# Altium PCB Layout.PcbDoc
Units mm, origin at the board's own origin, x right, y up, seen from the top; angles counter-clockwise.
Board outline 152.4 x 101.6 mm, 2 copper layers (Top Layer, Bottom Layer); 11 components, 7 nets, 37 pads, 8 vias.
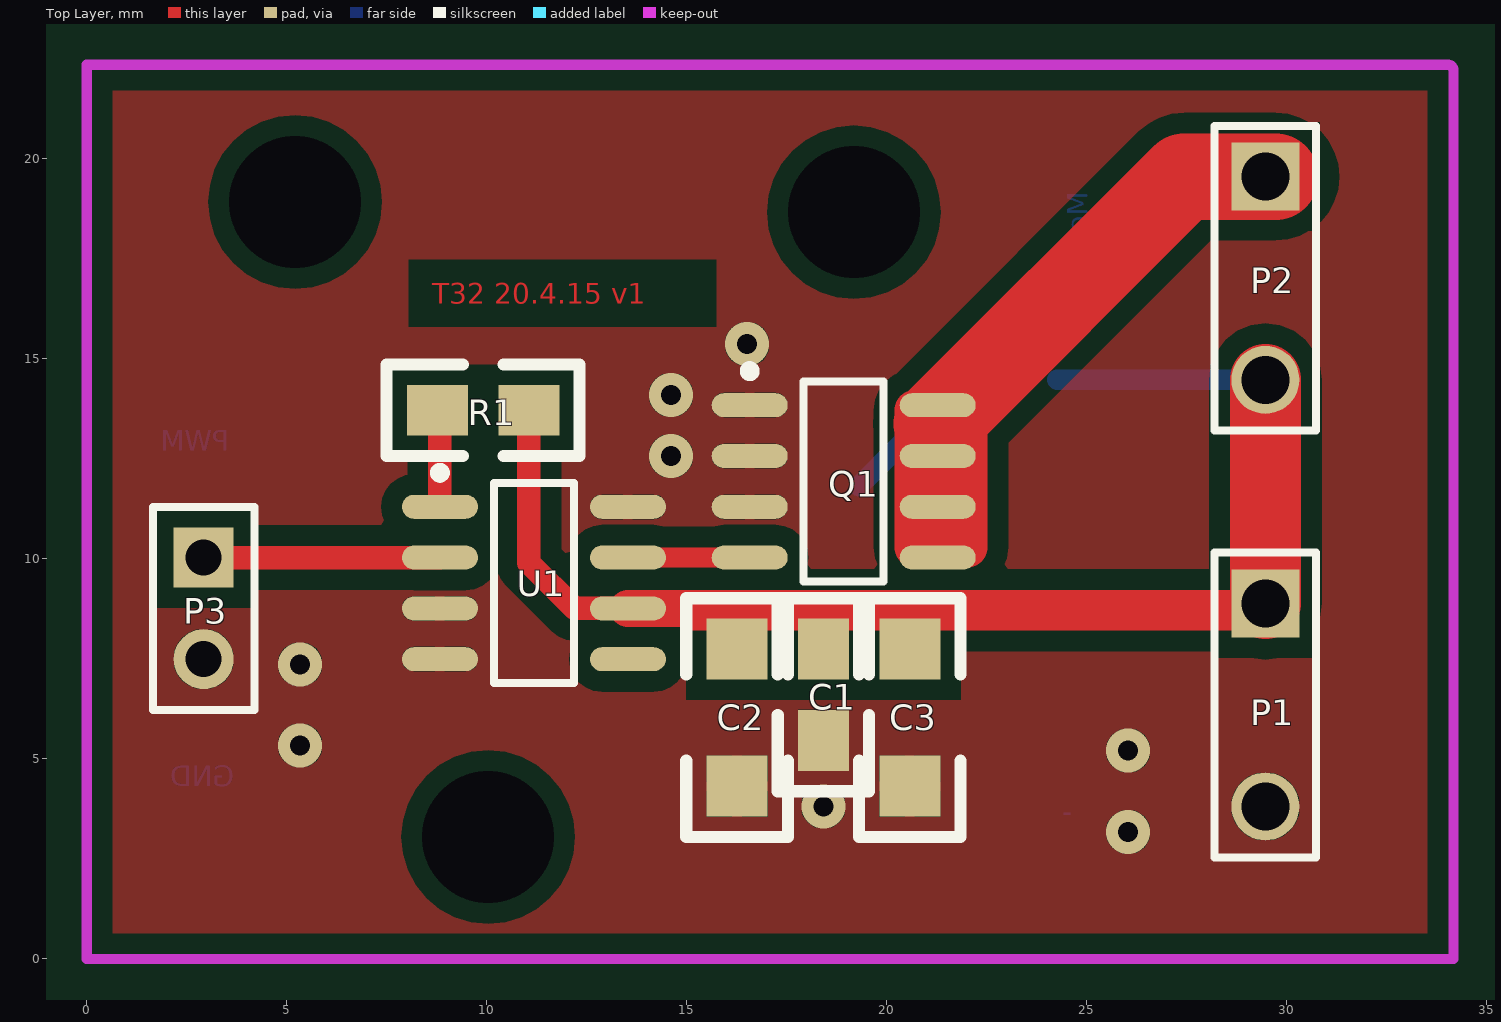
[diagram p0: Top Layer view]
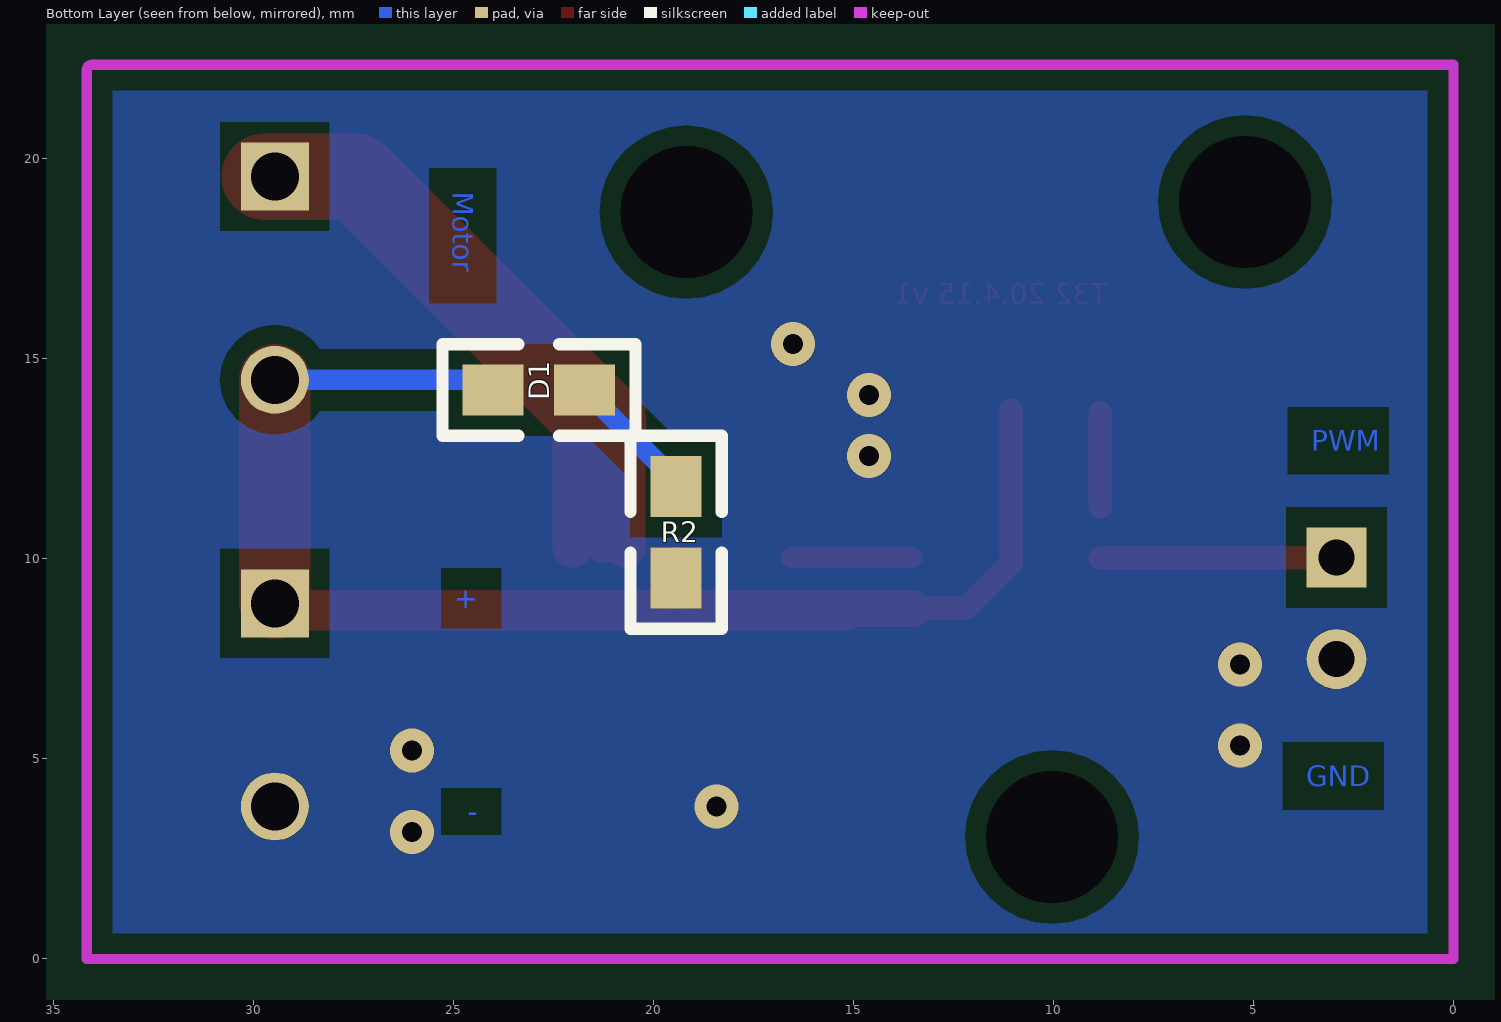
[diagram p1: Bottom Layer view, seen from below]

## Layer stack, top to bottom
Top Solder: solder mask 0.0102, Solder Resist, Dk 3.5
Top Layer: signal copper 0.0356
Dielectric 1: dielectric 0.32, FR-4, Dk 4.8
Bottom Layer: signal copper 0.0356
Bottom Solder: solder mask 0.0102, Solder Resist, Dk 3.5

## Board outline
-27.813,-37.846 124.587,-37.846 124.587,63.754 -27.813,63.754

## Design rules (kind name [scope] priority, off if disabled: settings)
Clearance [All] p1: gap=0.508
HoleSize [All] p1 off: absolutevalues=TRUE maxlimit=2.54 minlimit=0.025 maxpercent=80.000 minpercent=20.000
PlaneClearance [All] p1 off: clearance=0.508
PolygonConnect [InNet('NetP2_1') vs OnLayer('Top Layer')     and   OnLayer('Bottom Layer')] p1: connectstyle=Direct reliefconductorwidth=0.254 reliefentries=4 polygonreliefangle="90 Angle" airgapwidth=0.254
RoutingVias [All] p1: holewidth=0.711 width=1.27 viastyle="Through Hole" minholewidth=0.711 minwidth=1.27 maxholewidth=0.711 maxwidth=1.27
SilkToBoardRegionClearance [All] p1 off:
SilkToSilkClearance [All] p1 off: silktosilkclearance=0.254
SilkToSolderMaskClearance [IsPad] p1 off: minsilkscreentomaskgap=0.254 clearancetoexposedcopper=TRUE
SolderMaskExpansion [All] p1: expansion=0.102
UnpouredPolygon [All] p1: allowunpoured=FALSE
Width [All] p1: maxlimit=5.08 minlimit=0.508 preferedwidth=0.508
24 further rules are at their usual default settings.

## Components (designator, comment, footprint, x,y, rotation, side; value= is the part's Value field where it differs from the comment)
C1 "10n" 0805 18.415,7.747 r270 top
C2 "10u" 1206 16.256,7.747 r270 top
C3 "10u" 1206 20.574,7.747 r270 top
D1 "LED" 0805 21.717,14.224 r0 bottom
P1 "PWR" Stecker_1x2_200mil 29.464,6.35 r270 top
P2 "Motor" Stecker_1x2_200mil 29.464,17.018 r270 top
P3 "PWM" HDR1X2 2.921,10.033 r270 top
Q1 "Si4178DY" SO-8_L 18.923,11.938 r0 top
R1 "10k" 0805 8.763,13.716 r0 top
R2 "1.2k" 0805 19.431,9.525 r90 bottom
U1 "FAN3278" SO-8_L 11.176,9.398 r0 top

## Footprints (in the part's own frame and the unit in brackets; to place one, negate y for a bottom-side part, rotate by r counter-clockwise, add the part's x,y. Pads: shape width x height; smd on the part's side, far side on the other; paste and mask are expansions set on the pad)
0805 [mil]
  rect 60x50 smd: 1(0,0) 2(90,0)
  silkscreen extent -50,-45 140,45
1206 [mil]
  rect 60x60 smd: 1(0,0) 2(135,0)
  silkscreen extent -50,-50 185,50
HDR1X2 [mm] "Connector; Header; 2 Position"
  rect 1.5x1.5 hole 0.9: 1(0,0)
  round 1.5 hole 0.9: 2(2.54,0)
  silkscreen extent -1.27,-1.27 3.81,1.27
SO-8_L [mm] "8-Pin Plastic Small Outline Integrated Circuit 1.27 mm Pitch, IPC High Density"
  oval 1.9x0.6 smd: 1(-2.35,1.905) 2(-2.35,0.635) 3(-2.35,-0.635) 4(-2.35,-1.905) 5(2.35,-1.905) 6(2.35,-0.635) 7(2.35,0.635) 8(2.35,1.905)
  silkscreen extent -2.47,-2.5 1,2.88
Stecker_1x2_200mil [mm]
  rect 1.7x1.7 hole 1.2: 1(-2.54,0)
  round 1.7 hole 1.2: 2(2.54,0)
  silkscreen extent -3.81,-1.27 3.81,1.27

## Part data
C1 C2 C3: library part C?, "Normaler Kondensator"
P1 P2 P3: library part "Header 2", "Header, 2-Pin"
Q1: library part SI4412DY, "N-Channel 30V (D-S)  Rated MOSFET"
R1 R2: library part R?, "Normaler Widerstand"

## Free pads (board coordinates)
  round 1.524 hole 3.3 unplated: 1(5.207,18.923) 1(10.033,3.048) 1(19.177,18.669)

## Via types
v1: diameter 1.1, hole 0.5, Top Layer to Bottom Layer, tented both sides, 8 vias

## Nets (pads, with @x,y where several pads share a name; then routed paths per layer and width w, separated by ;. In a path a pad name is that pad's centre, name@x,y a point inside that pad or via, vN(x,y) a via of type N, cw(c..) or ccw(c..) an arc to the next point about the centre after c; other vN are vias at no path point)
GND: C1.2 C2.2 C3.2 P1.2 P3.2 Q1.1 Q1.2 Q1.3 R2.1 U1.3 U1.4 U1.8
  other v1: 26.035,3.175 18.415,3.81 26.035,5.207 5.334,5.334 5.334,7.366 14.605,12.573 14.605,14.097 16.51,15.367
NetD1_1: D1.1 R2.2 | length 3.4
  Bottom Layer w0.508: R2.2@19.304,11.811 D1.1
NetP2_1: P2.1 Q1.5 Q1.6 Q1.7 Q1.8 | length 20.8
  Top Layer w1.016: Q1.5@20.702,10.287 Q1.8@20.702,13.716 ; 21.25,10.414 21.25,13.376 ; Q1.5@22.012,10.287 Q1.8@22.012,13.716
  Top Layer w2.159: 21.25,13.376 27.432,19.558 P2.1@29.718,19.558
NetP3_1: P3.1 U1.2 | length 5.9
  Top Layer w0.584: P3.1 U1.2
NetQ1_4: Q1.4 U1.7 | length 3
  Top Layer w0.508: U1.7 Q1.4
NetR1_1: R1.1 U1.1 | length 2.4
  Top Layer w0.584: U1.1 R1.1@8.826,13.653
VCC: C1.1 C2.1 C3.1 D1.2 P1.1 P2.2 R1.2 U1.6 | length 34.6
  Top Layer w0.584: R1.2 11.049,9.906 12.192,8.763 U1.6
  Top Layer w0.922: U1.6 16.129,8.763
  Top Layer w1.016: 15.194,8.717 29.464,8.717 P1.1
  Top Layer w1.778: P1.1 P2.2
  Bottom Layer w0.508: D1.2@24.257,14.478 P2.2
pads on no net: U1.5

## Polygon pours and split planes (outlines as drawn)
GND on Top Layer "Top Layer-No Net" (solid, remove dead copper, pour order 4): -0.127,23.495 -0.127,-2.286 36.449,-2.286 34.036,-2.286 34.036,23.716
GND on Bottom Layer "Top Layer-No Net" (solid, remove dead copper, pour order 3): 0.127,23.245 0.127,-2.413 33.655,-2.413 33.655,24.006 33.576,24.083

## Keep-outs
Keep-Out Layer:
  lines w0.254: 0,0 34.163,0 34.163,22.225 ccw(c34.036,22.225) 34.036,22.352 0,22.352 0,0

## Other copper
Top Layer:
  text "T32 20.4.15 v1" at 8.636,16.383 h0.51
Bottom Layer:
  text "Motor" at 25.019,19.177 h0.51 r90
  text "PWM" at 3.556,12.7 h0.51
  text "+" at 24.384,8.763 h0.51
  text "GND" at 3.683,4.318 h0.51
  text "-" at 24.384,3.429 h0.51

## Silkscreen, mask and mechanical layers (free items; w line width, h text height)
Mechanical 1:
  lines w0.254: 34.163,22.225 34.163,0 0,0 0,22.352 34.163,22.352